# Altium PCB SIM800.PcbDoc
Units mm, origin at the board's own origin, x right, y up, seen from the top; angles counter-clockwise.
Board outline 80 x 35 mm, 2 copper layers (Top Layer, Bottom Layer); 17 components, 18 nets, 70 pads, 9 vias.
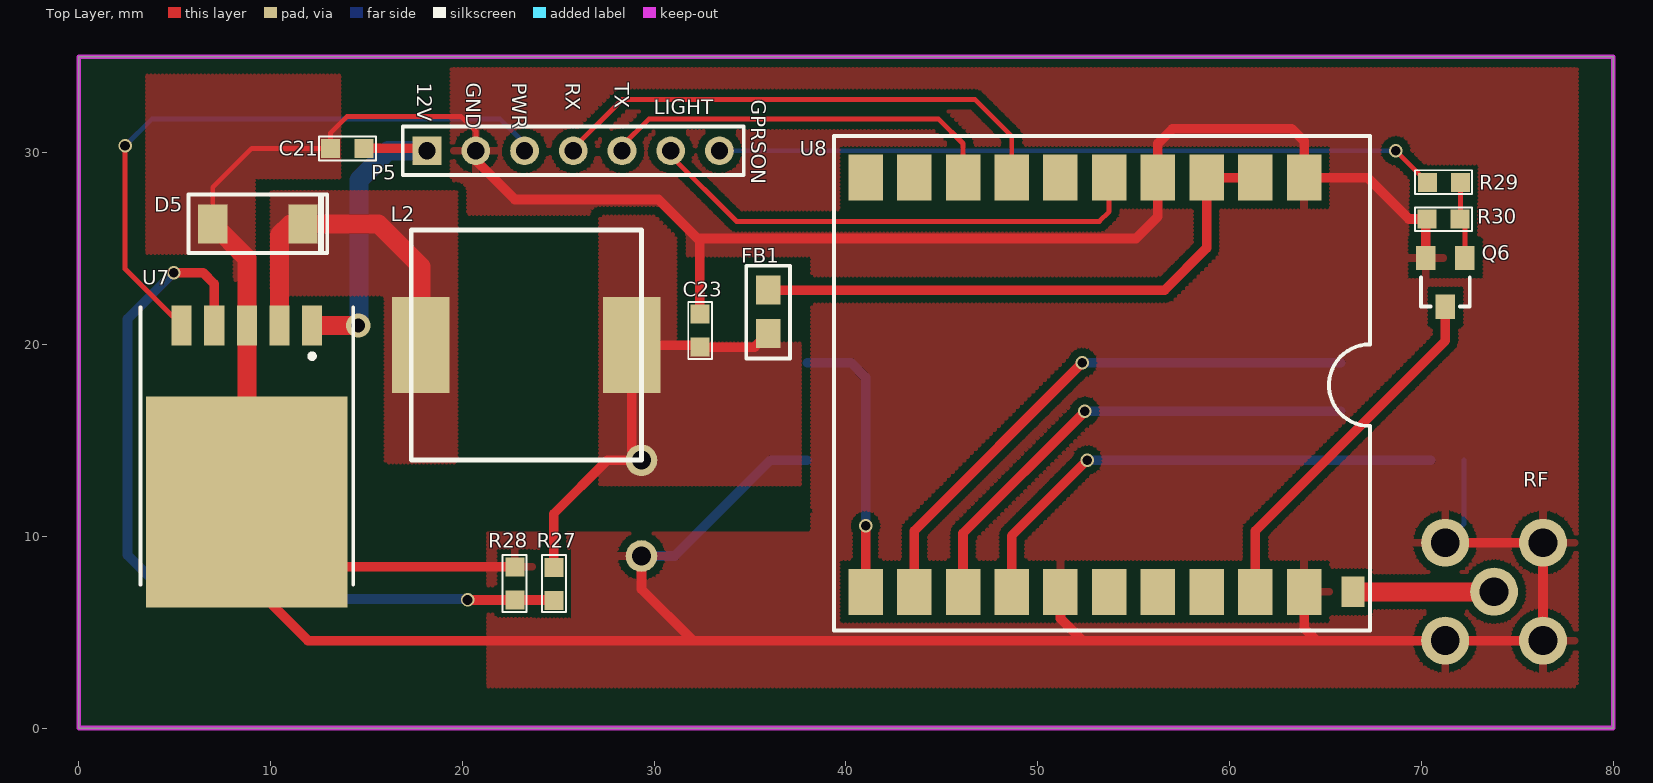
[diagram p0: Top Layer view]
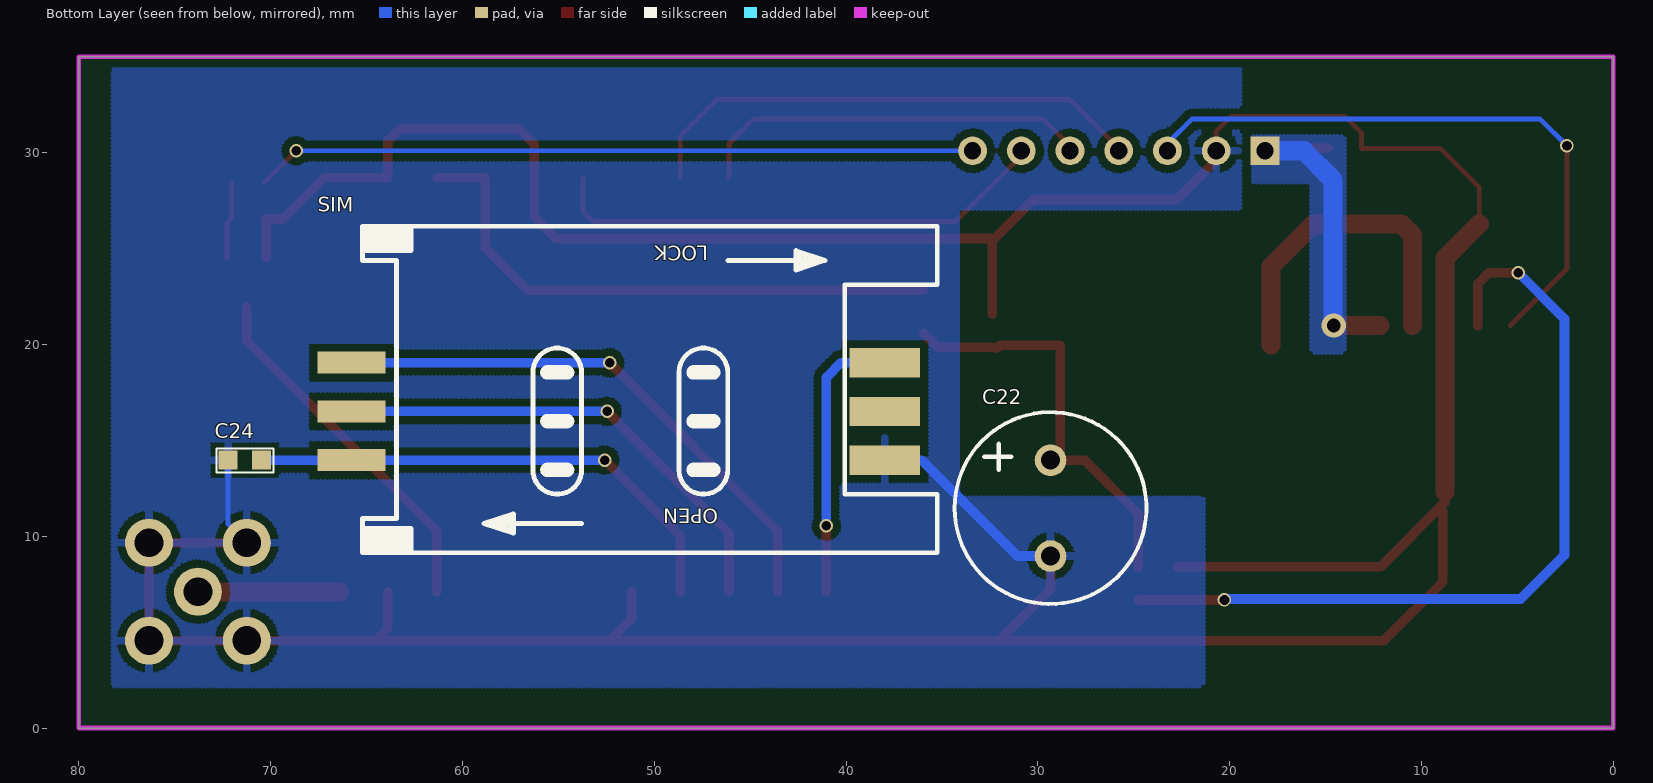
[diagram p1: Bottom Layer view, seen from below]

## Layer stack, top to bottom
Top Layer: signal copper 0.0356
Dielectric: dielectric 0.32, FR-4, Dk 4.8
Bottom Layer: signal copper 0.0356

## Board outline
0,0 0,35 80,35 80,0

## Design rules (kind name [scope] priority, off if disabled: settings)
Clearance [All] p1: gap=0.4
ComponentClearance [All] p1: gap=0.254 collisioncheckmode=3 verticalgap=0.254
PolygonConnect [All] p1: connectstyle=Relief reliefconductorwidth=0.4 reliefentries=4 polygonreliefangle="90 Angle"
RoutingVias [All] p1: holewidth=0.711 width=1.27 viastyle="Through Hole" minholewidth=0.5 minwidth=0.7 maxholewidth=0.711 maxwidth=1.27
SolderMaskExpansion [All] p1: expansion=0.102
TestPointUsage [All] p1: valid=0 allowmultiple=FALSE
Testpoint [All] p1: side=15 testpointundercomponent=TRUE minsize=1.016 maxsize=2.54 preferedsize=1.524 minholesize=0 maxholesize=1.016 preferedholesize=0.813 testpointgrid=0.025 style=1023 order=0-112345678
Width [All] p1: maxlimit=1 minlimit=0.2 preferedwidth=0.254
18 further rules are at their usual default settings.

## Components (designator, comment, footprint, x,y, rotation, side; value= is the part's Value field where it differs from the comment)
C21 "Cap" 0603 14.859,30.226 r0 top
C22 "Cap Pol1" "C_DJ - duplicate" 29.337,13.97 r90 bottom
C23 "Cap" 0603 32.385,21.59 r90 top
C24 "Cap" 0603 70.485,13.97 r180 bottom
D5 "SS34" M7-4007 6.985,26.289 r0 top
FB1 "Inductor" 0805 35.941,20.574 r90 top
L2 "Inductor" L12*12 29.337,13.97 r90 top
P5 "Header 7" HDR1X7 18.161,30.099 r0 top
Q6 "" NPN-PNP 72.263,24.511 r180 top
R27 "Res2" 0603 24.765,8.382 r90 top
R28 "Res2" 0603 22.733,6.68 r270 top
R29 "Res2" 0603 70.307,28.448 r180 top
R30 "Res2" 0603 72.009,26.543 r0 top
RF "RF" RF_2 73.787,7.112 r0 top
SIM "" SIMCARD 37.973,13.97 r90 bottom
U7 "LM2596S-ADJ" TO-263-5 8.763,16.764 r180 top
U8 "SIM800G" M590E_1 63.881,28.702 r180 top

## Footprints (in the part's own frame and the unit in brackets; to place one, negate y for a bottom-side part, rotate by r counter-clockwise, add the part's x,y. Pads: shape width x height; smd on the part's side, far side on the other; paste and mask are expansions set on the pad)
0603 [mil]
  rect 39x39 smd: 1(0,0) 2(-68,0)
  silkscreen extent -92,-25 25,24
0805 [mil]
  rect 60x50 smd: 1(0,0) 2(89.02,0)
  silkscreen extent -51,-45 139,45
"C_DJ - duplicate" [mil]
  round 65 hole 39: 1(0,0) 2(-196.85,0)
  silkscreen extent -295,-197 98,197
HDR1X7 [mm] "Connector; Header; 7 Position"
  rect 1.5x1.5 hole 0.9: 1(0,0)
  round 1.5 hole 0.9: 2(2.54,0) 3(5.08,0) 4(7.62,0) 5(10.16,0) 6(12.7,0) 7(15.24,0)
  silkscreen extent -1.27,-1.27 16.51,1.27
L12*12 [mm]
  rect 5x3 smd: 1(6,11.5) 2(6,0.5)
  silkscreen extent 0,0 12,12
M7-4007 [mil]
  rect 60x80 smd: 1(0,0) 2(185,0)
  silkscreen extent -50,-60 235,60
M590E_1 [mm]
  rect 1.8x2.4 smd: 1(0,0) 2(2.54,0) 3(5.08,0) 4(7.62,0) 5(10.16,0) 6(12.7,0) 7(15.24,0) 8(17.78,0) 9(20.32,0) 10(22.86,0) 11(22.86,21.6) 12(20.32,21.6) 13(17.78,21.6) 14(15.24,21.6) 15(12.7,21.6) 16(10.16,21.6) 17(7.62,21.6) 18(5.08,21.6) 19(2.54,21.6) 20(0,21.6)
  rect 1.2x1.6 smd: 21(-2.54,21.6)
  silkscreen extent -3.43,-2.16 24.51,23.62
NPN-PNP [mil]
  rect 40x50 smd: B(0,0) C(40,100) E(80,0)
  silkscreen extent -10,40 90,100
RF_2 [mm]
  round 2.5 hole 1.5: 0(-2.55,-2.55) 0(-2.55,2.55) 0(2.55,-2.55) 0(2.55,2.55) 1(0,0)
SIMCARD [mil]
  rect 60x145 smd: 1(0,0) 2(100,0) 3(200,0)
  rect 45x140 smd: 4(0,1095) 5(100,1095) 6(200,1095)
  silkscreen extent -190,-108 480,1072
TO-263-5 [mm]
  rect 1.05x2.1 smd: 1(-3.4,-4.225) 2(-1.7,-4.225) 3(0,-4.225) 4(1.7,-4.225) 5(3.4,-4.225)
  rect 10.5x11 smd: 6(0,4.987)
  silkscreen extent -5.55,-5.18 5.55,9.28, body extent -5.33,-4.7 5.33,10.29, height 3

## Part data
C21 C23 C24: "Capacitor"
C22: "Polarized Capacitor (Radial)"
D5: library part "Diode 1N4007", "1 Amp General Purpose Rectifier"
P5: "Header, 7-Pin"
Q6: library part 2N3904, "NPN General Purpose Amplifier"
R27 R28 R29 R30: "Resistor"
SIM: library part SIM_CARD, "SIM CARD"
U7: library part LM2596S-5.0, "5V稳压芯片"
U8: library part M590

## Via types
v1: diameter 0.7, hole 0.5, Top Layer to Bottom Layer, 8 vias
v2: diameter 1.27, hole 0.711, Top Layer to Bottom Layer, 1 vias

## Nets (pads, with @x,y where several pads share a name; then routed paths per layer and width w, separated by ;. In a path a pad name is that pad's centre, name@x,y a point inside that pad or via, vN(x,y) a via of type N, cw(c..) or ccw(c..) an arc to the next point about the centre after c; other vN are vias at no path point)
GND: C21.2 C22.2 C23.1 C24.2 D5.1 P5.2 Q6.E R28.2 R30.2 RF.0 SIM.1 U7.3 U7.6 U8.1 U8.4 U8.15 U8.20 | length 223.8
  Top Layer w0.254: D5.1 6.985,28.194 9.017,30.226 C21.2 13.132,31.039 13.97,31.877 19.939,31.877 20.701,31.115 P5.2
  Top Layer w0.5: U7.6 12.133,8.407 R28.2 ; U7.6@8.89,11.303 8.89,7.62 11.948,4.562 76.337,4.562 76.337,9.662 RF.0@71.237,9.662 ; P5.2 20.701,29.591 22.733,27.559 30.226,27.559 32.258,25.527 55.118,25.527 56.261,26.67 56.261,30.48 57.023,31.242 63.246,31.242 63.881,30.607 U8.1 67.183,28.702 69.342,26.543 R30.2 70.231,26.492 Q6.E ; C22.2 29.337,7.239 32.014,4.562 ; C23.1 32.385,25.527 ; U8.15 51.181,5.715 52.334,4.562 ; U8.20 63.881,5.207 64.526,4.562
  Top Layer w1: D5.1 8.763,24.511 U7.6@8.763,12.319
  Bottom Layer w0.254: RF.0@71.237,9.662 72.212,10.637 C24.2
  Bottom Layer w0.5: C22.2 31.068,8.97 36.068,13.97 SIM.1
GPRS_RX: P5.4 U8.7 | length 27.1
  Top Layer w0.254: P5.4@25.527,30.226 25.781,30.226 28.321,32.766 46.736,32.766 48.641,30.861 U8.7
GPRS_TX: P5.5 U8.8 | length 21.4
  Top Layer w0.254: P5.5@28.321,29.591 28.321,30.353 29.718,31.75 44.831,31.75 46.101,30.48 U8.8
NetC22_1: C22.1 C23.2 FB1.1 L2.2 R27.1 | length 21.9
  Top Layer w0.5: R27.1 24.765,11.176 27.559,13.97 C22.1 28.837,14.47 L2.2 31.973,19.97 C23.2@32.131,19.812 ; C23.2 35.23,19.863 FB1.1
NetC24_1: C24.1 SIM.4 U8.14 | length 26.4
  Top Layer w0.5: U8.14 48.641,10.033 v1(52.578,13.97)
  Bottom Layer w0.5: v1(52.578,13.97) C24.1
NetD5_2: D5.2 L2.1 U7.2 | length 17.4
  Top Layer w1: U7.2 10.463,25.703 11.049,26.289 15.621,26.289 17.837,24.073 L2.1
NETLIGHT: P5.6 U8.5 | length 26.5
  Top Layer w0.254: P5.6 30.861,29.845 34.29,26.416 53.213,26.416 53.721,26.924 U8.5
NetQ6_B: Q6.B R29.2 R30.1 | length 4
  Top Layer w0.254: R29.2 72.034,26.568 72.263,26.34 Q6.B
NetQ6_C: Q6.C U8.19 | length 19
  Top Layer w0.5: U8.19 61.341,10.287 71.247,20.193 Q6.C
NetR27_2: R27.2 R28.1 U7.4 | length 43.4
  Top Layer w0.5: v1(4.953,23.749) 6.477,23.749 7.063,23.163 U7.4 ; v1(20.269,6.68) R27.2@24.74,6.68
  Bottom Layer w0.5: v1(4.953,23.749) 2.54,21.336 2.54,9.017 4.826,6.731 20.218,6.731 v1(20.269,6.68)
NetRF_1: RF.1 U8.21 | length 7.4
  Top Layer w0.5: RF.1@73.777,7.102 RF.1
  Top Layer w1: U8.21 RF.1@73.777,7.102
NetSIM_3: SIM.3 U8.11 | length 14.5
  Top Layer w0.5: U8.11 v1(41.021,10.541)
  Bottom Layer w0.5: SIM.3 40.259,19.05 41.021,18.288 v1(41.021,10.541)
NetSIM_5: SIM.5 U8.13 | length 25.4
  Top Layer w0.5: U8.13 46.101,10.16 v1(52.451,16.51)
  Bottom Layer w0.5: v1(52.451,16.51) SIM.5
NetSIM_6: SIM.6 U8.12 | length 29
  Top Layer w0.5: U8.12 43.561,10.287 v1(52.324,19.05)
  Bottom Layer w0.5: v1(52.324,19.05) SIM.6
PWR_CTRL: P5.3 U7.5 | length 32.9
  Top Layer w0.254: v1(2.413,30.353) 2.413,23.939 U7.5
  Bottom Layer w0.254: v1(2.413,30.353) 3.81,31.75 21.971,31.75 23.241,30.48 P5.3
PWRKEY: P5.7 R29.1 | length 37.6
  Top Layer w0.254: v1(68.656,30.099) R29.1
  Bottom Layer w0.254: P5.7 v1(68.656,30.099)
VCC_3.9V: FB1.2 U8.2 U8.3 | length 30
  Top Layer w0.5: FB1.2 56.617,22.835 58.801,25.019 U8.3 U8.2
VCC_12V: C21.1 P5.1 U7.1 | length 17.6
  Top Layer w0.5: C21.1 18.034,30.226 P5.1
  Top Layer w1: U7.1 v2(14.571,20.989)
  Bottom Layer w1: v2@14.605,20.955 14.605,28.575 16.129,30.099 P5.1
pads on no net: SIM.2 U8.6 U8.9 U8.10 U8.16 U8.17 U8.18

## Polygon pours and split planes (outlines as drawn)
NetD5_2 on Top Layer "Top Layer-No Net" (hatched 90Degree grid 0.2 track 0.203, pour order 1000): 10.033,22.606 10.16,22.733 10.033,22.86 10.033,27.94 19.685,27.94 19.685,18.796 19.685,13.97 19.558,13.843 16.002,13.843 16.002,22.479 15.875,22.606 10.033,22.606
NetC22_1 on Top Layer "Top Layer-No Net" (hatched 90Degree grid 0.2 track 0.203, pour order 1001): 27.178,26.67 27.178,15.875 27.178,12.7 37.592,12.7 37.592,20.066 31.211,20.066 31.115,19.97 31.12,19.975 31.12,26.665 27.183,26.665 27.178,26.67
GND on Top Layer "Top Layer-No Net" (hatched 90Degree grid 0.2 track 0.203, pour order 1002): 13.589,34.036 13.589,28.702 9.144,28.702 9.144,23.368 8.128,23.368 8.128,24.765 3.556,24.765 3.556,34.036
GND on Top Layer "Top Layer-No Net" (hatched 90Degree grid 0.2 track 0.203, pour order 1003): 19.431,34.671 19.431,27.178 19.685,26.924 19.812,26.797 29.584,26.797 29.845,26.536 31.743,24.638 38.227,24.638 38.227,10.287 38.1,10.16 21.336,10.16 21.336,2.286 21.209,2.159 78.105,2.159 78.105,34.544
VCC_12V on Bottom Layer "Top Layer-No Net" (hatched 90Degree grid 0.2 track 0.203, pour order 1004): 18.796,30.861 13.97,30.861 13.97,22.479 13.97,19.558 15.748,19.558 15.748,28.448 18.796,28.448 18.796,30.861
GND on Bottom Layer "Top Layer-No Net" (hatched 90Degree grid 0.2 track 0.203, pour order 1005): 19.431,34.417 19.431,27.051 34.163,27.051 34.163,13.208 34.13,13.175 34.13,12.032 21.369,12.032 21.336,12.065 21.336,2.667 21.336,2.286 21.463,2.159 78.232,2.159 78.232,34.29 78.105,34.417

## Keep-outs
Keep-Out Layer:
  the board outline again, w0.254

## Other copper
Top Layer:
  pour cut-out: 1.524,22.733 38.227,22.733 38.227,11.43 38.354,11.303 18.923,11.303 18.923,2.159 1.524,2.159

## Silkscreen, mask and mechanical layers (free items; w line width, h text height)
Top Overlay:
  text "12V" at 17.653,33.655 h0.76 r270
  text "GND" at 20.193,33.655 h0.76 r270
  text "PWR" at 22.606,33.655 h0.76 r270
  text "RX" at 25.4,33.655 h0.76 r270
  text "TX" at 27.94,33.655 h0.76 r270
  text "GPRSON" at 35.052,32.766 h0.76 r270
  text "LIGHT" at 29.972,32.004 h0.76

## Text inside footprints (layer, text, board x,y; h text height)
SIM: Bottom Overlay "LOCK" at 47.18,25.146 h0.76 r180; Bottom Overlay "OPEN" at 46.672,11.43 h0.76 r180